# Altium PCB PCB.PcbDoc
Units mm, origin at the board's own origin, x right, y up, seen from the top; angles counter-clockwise.
Board outline 40.01 x 30.48 mm, 2 copper layers (Top Layer, Bottom Layer); 68 components, 49 nets, 270 pads, 61 vias.
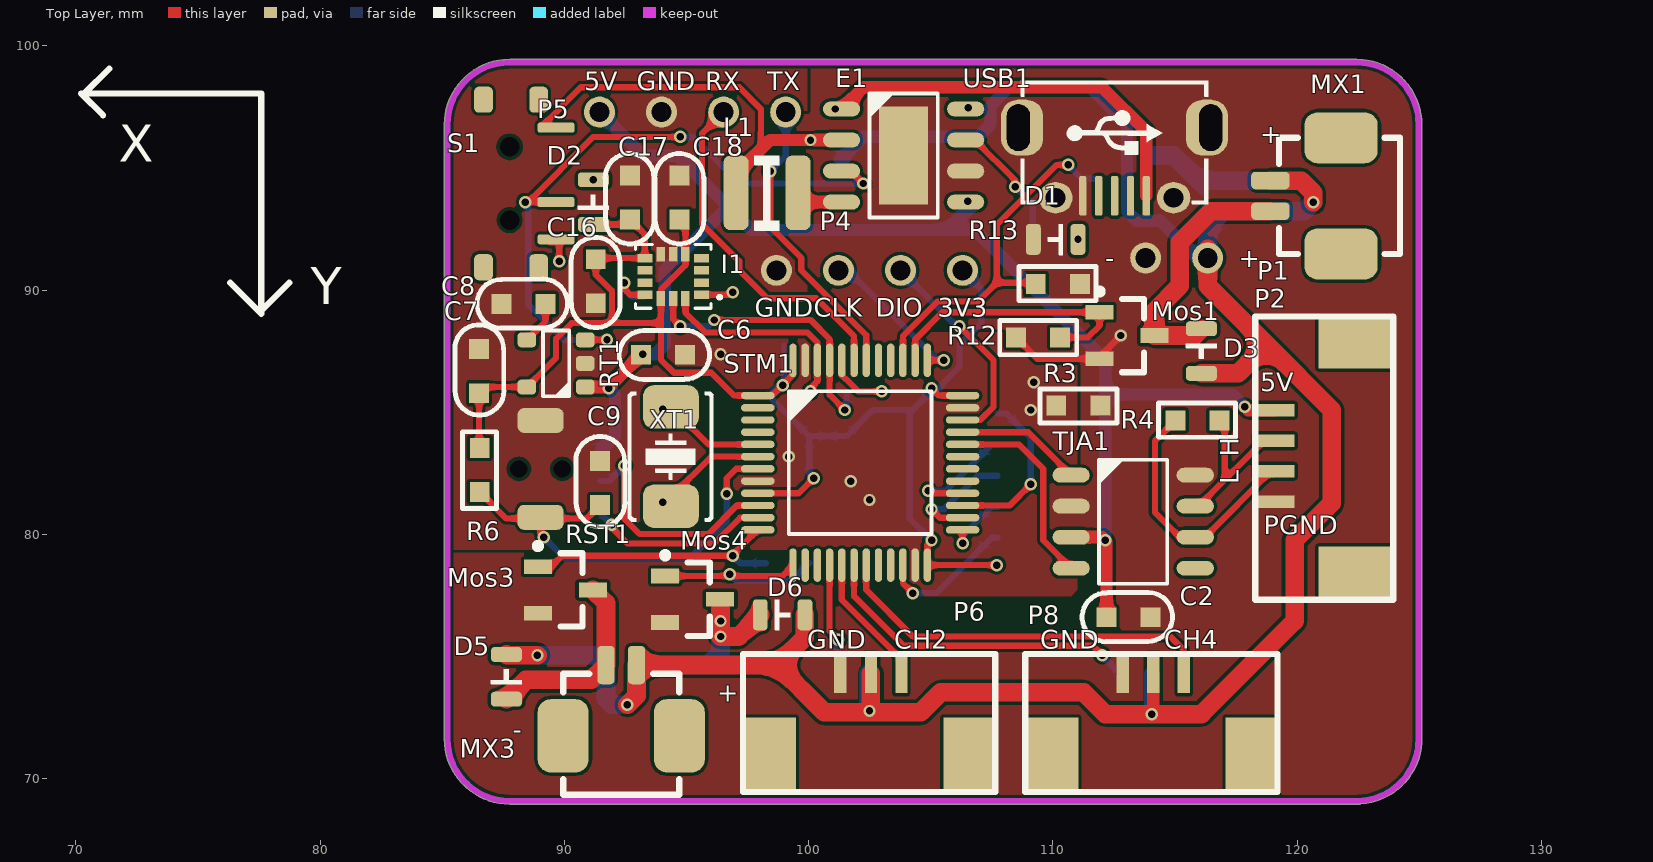
[diagram p0: Top Layer view]
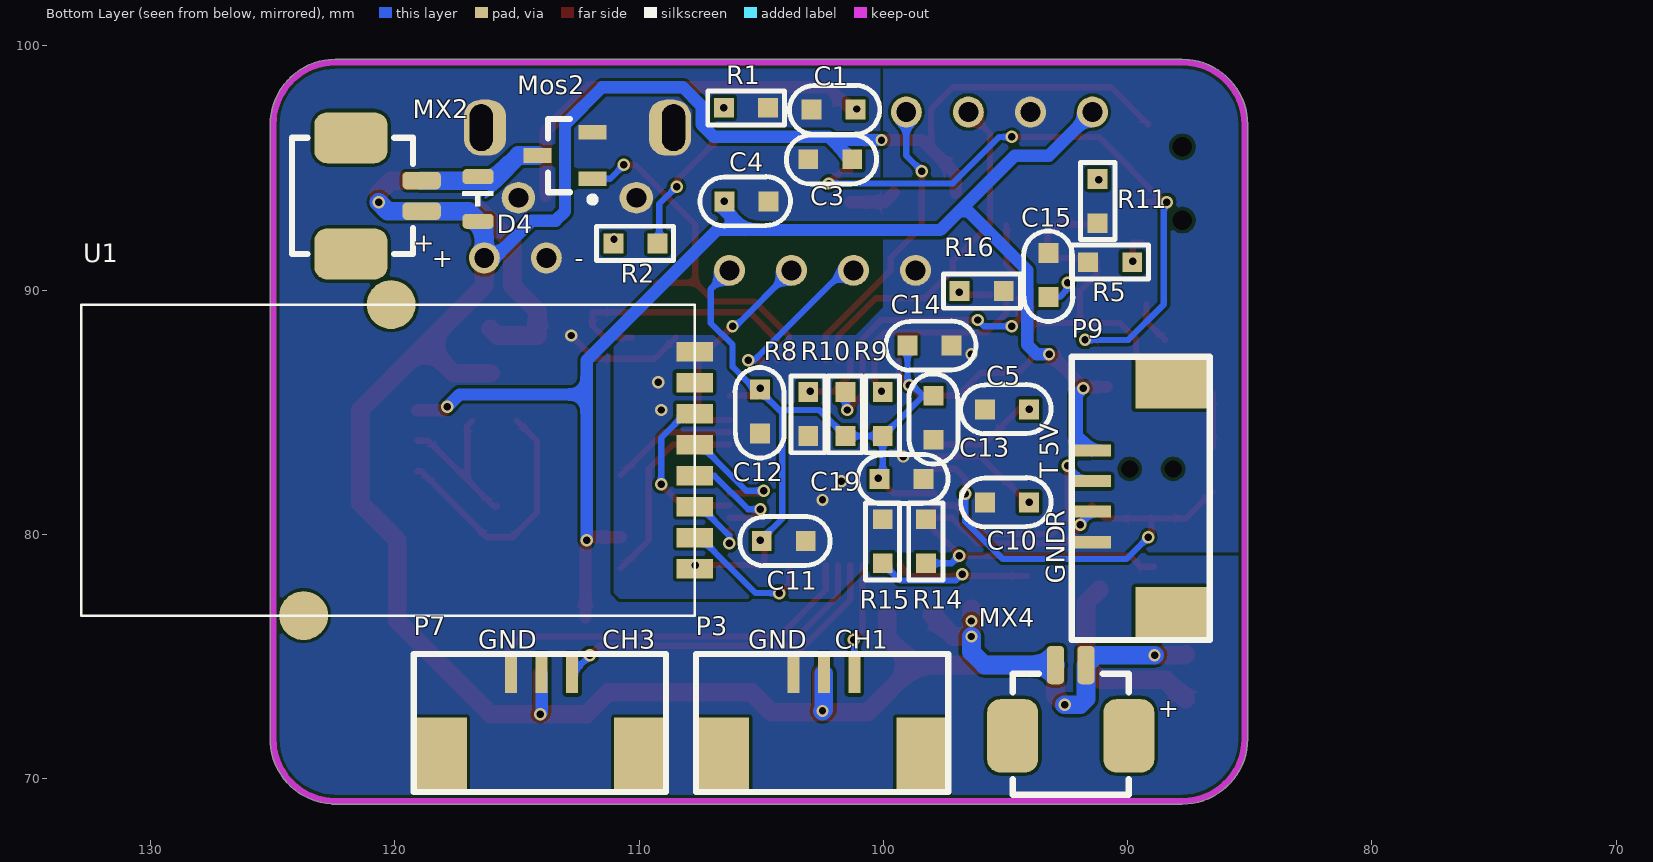
[diagram p1: Bottom Layer view, seen from below]
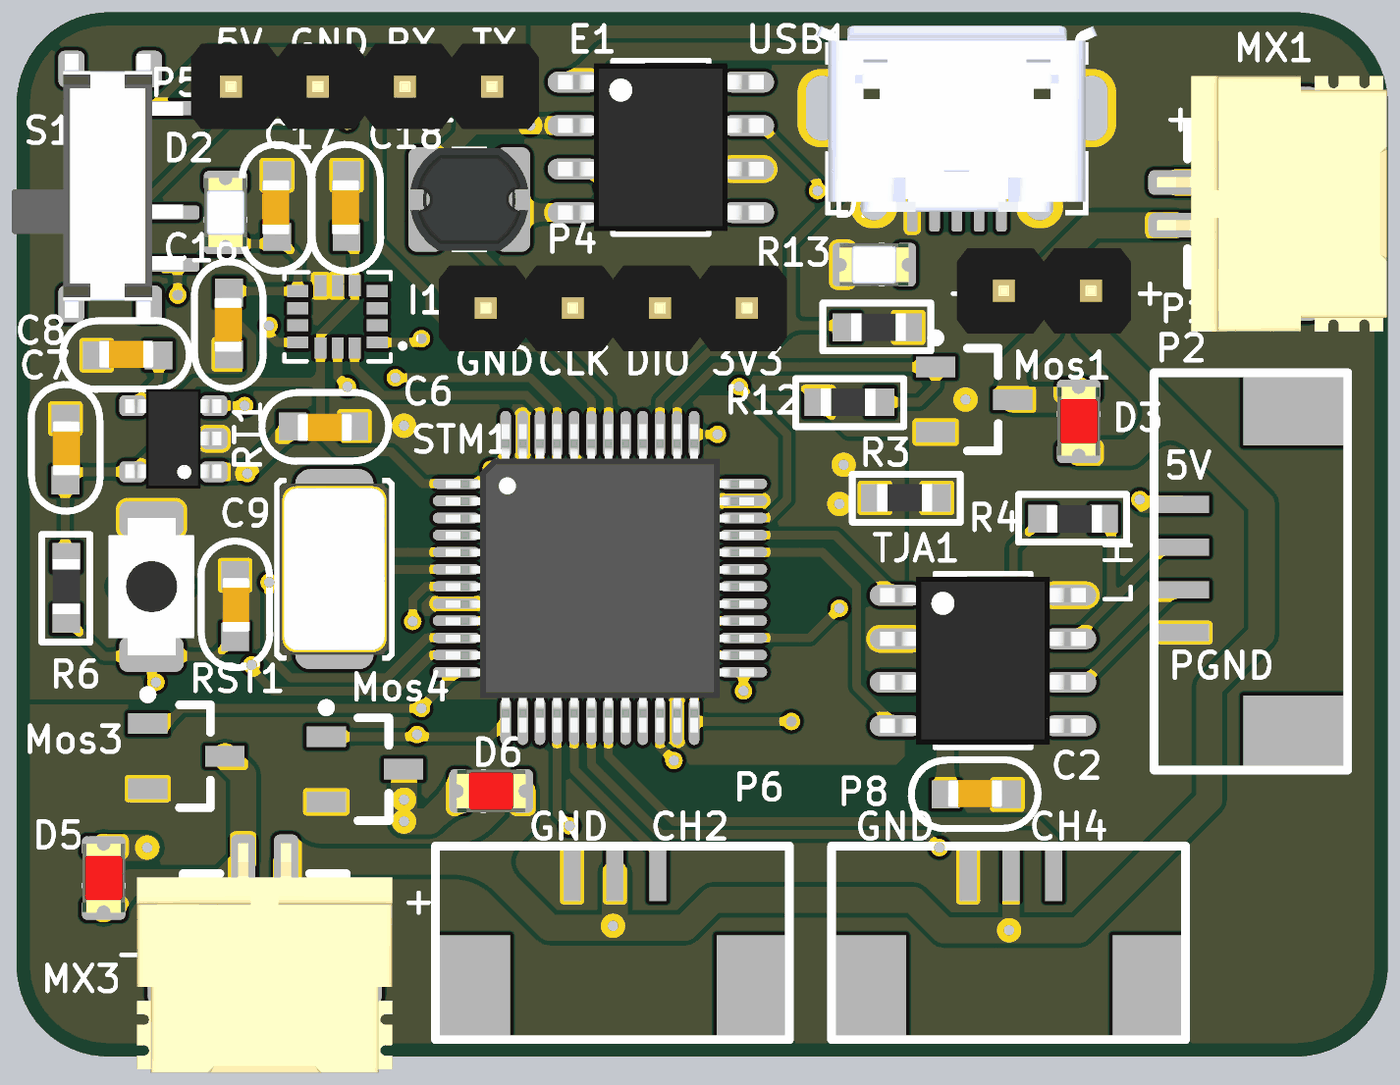
[diagram p2: 3D render of the assembled board from above, using the file's embedded part models]
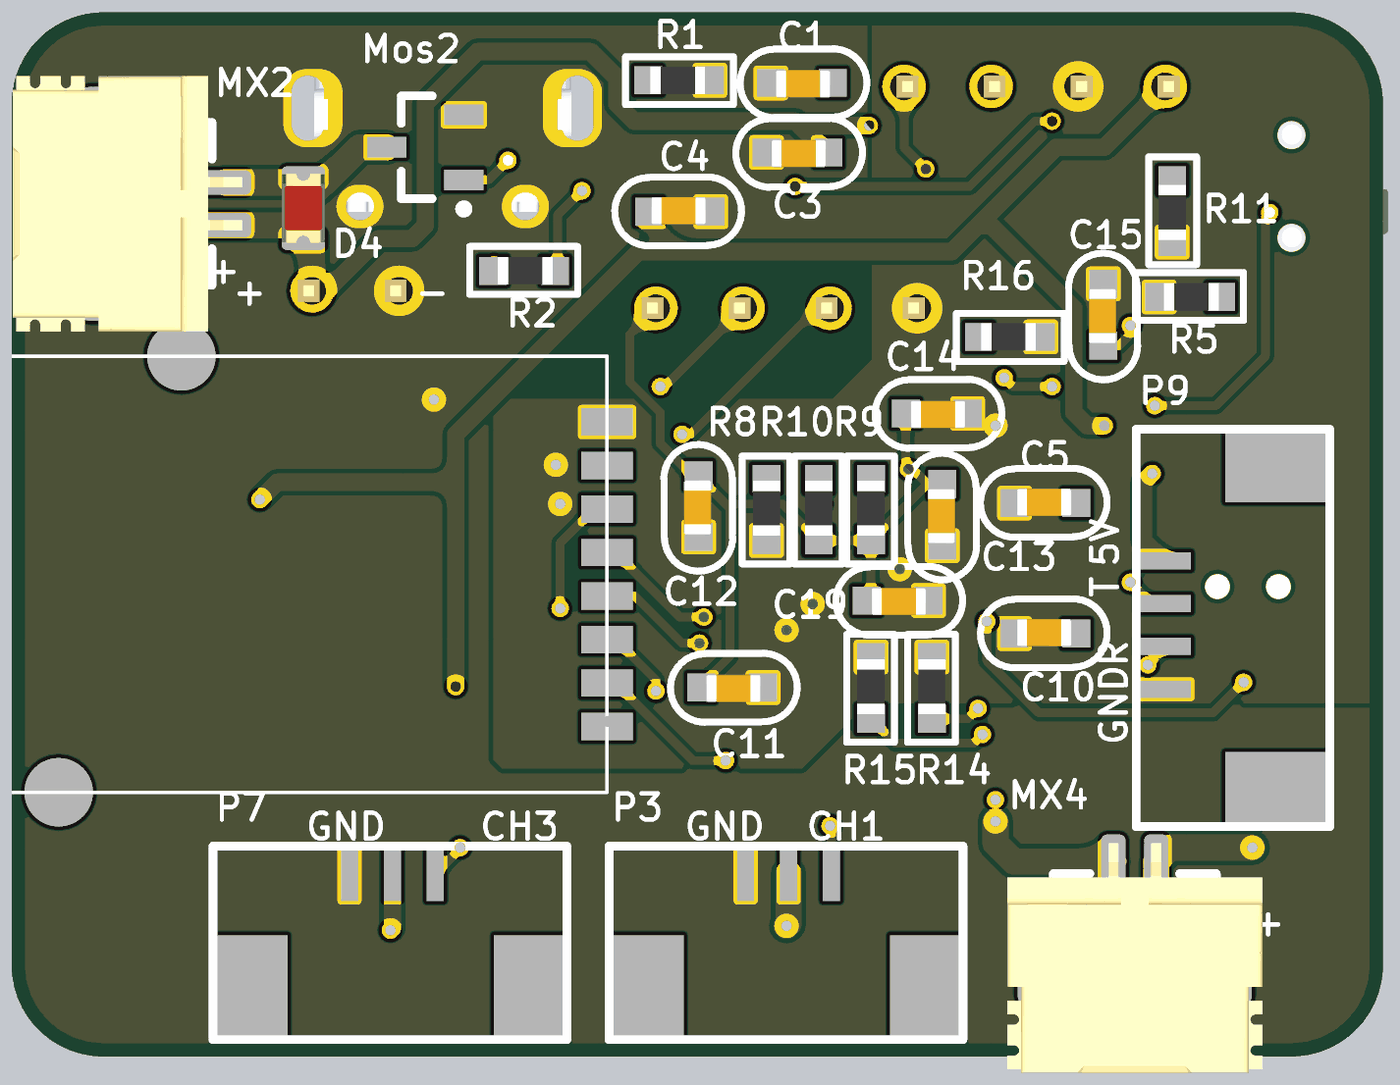
[diagram p3: 3D render of the assembled board from below, using the file's embedded part models]

## Layer stack, top to bottom
Top Solder: solder mask 0.0102, Solder Resist, Dk 3.5
Top Layer: signal copper 0.0356
Dielectric 1: dielectric 0.32, FR-4, Dk 4.8
Bottom Layer: signal copper 0.0356
Bottom Solder: solder mask 0.0102, Solder Resist, Dk 3.5

## Board outline
85.09,71.628 ccw(c87.757,71.628) 87.757,68.961 122.555,68.961 ccw(c122.555,69.088) 122.59,68.966 ccw(c122.428,71.628) 125.09,71.466 ccw(c124.968,71.501) 125.095,71.501 125.095,96.774 ccw(c122.428,96.774) 122.428,99.441 87.757,99.441 ccw(c87.757,96.774) 85.09,96.774

## Design rules (kind name [scope] priority, off if disabled: settings)
Clearance [All] p1: gap=0.127 ignorepadtopadclearanceinfootprint=FALSE
ComponentClearance [All] p1: gap=0.254 collisioncheckmode=3 verticalgap=0 showdistances=TRUE
PlaneConnect [All] p1: planeconnectstyle=Direct reliefexpansion=0.508 reliefentries=4 reliefconductorwidth=0.254 reliefairgap=0.254
PolygonConnect [All] p1: connectstyle=Direct reliefconductorwidth=0.254 reliefentries=4 polygonreliefangle="90 Angle" airgapwidth=0.254
RoutingVias [All] p1: holewidth=0.711 width=1.27 viastyle="Through Hole" minholewidth=0.711 minwidth=1.27 maxholewidth=0.711 maxwidth=1.27
SolderMaskExpansion [All] p1: expansion=0.102
Width [All] p1: maxlimit=2.54 minlimit=0.254 preferedwidth=0.254 minimp=50.000000 maximp=50.000000 favimp=50.000000
28 further rules are at their usual default settings.

## Components (designator, comment, footprint, x,y, rotation, side; value= is the part's Value field where it differs from the comment)
C1 "Cap_0603" CAP_0603 101.981,97.409 r0 bottom value=0.1uF
C2 "Cap_0603" CAP_0603 113.03,76.581 r0 top value=0.1u
C3 "Cap_0603" CAP_0603 102.108,95.377 r0 bottom value=0.1uF
C4 "Cap_0603" CAP_0603 105.664,93.599 r180 bottom value=10uF
C5 "Cap_0603" CAP_0603 94.996,85.09 r180 bottom value=20pf
C6 "Cap_0603" CAP_0603 94.107,87.376 r180 top value=1u
C7 "Cap_0603" CAP_0603 86.487,86.741 r270 top value=0.1u
C8 "Cap_0603" CAP_0603 88.265,89.408 r0 top value=22n
C9 "Cap_0603" CAP_0603 91.44,82.169 r270 top value=0.1u
C10 "Cap_0603" CAP_0603 94.996,81.28 r180 bottom value=20pf
C11 "Cap_0603" CAP_0603 104.013,79.756 r0 bottom value=0.1u
C12 "Cap_0603" CAP_0603 105.029,84.963 r90 bottom value=0.1u
C13 "Cap_0603" CAP_0603 97.917,84.709 r90 bottom value=0.1u
C14 "Cap_0603" CAP_0603 98.044,87.757 r0 bottom value=0.1u
C15 "Cap_0603" CAP_0603 93.218,90.551 r90 bottom value=0.1uF
C16 "Cap_0603" CAP_0603 91.313,90.297 r90 top value=0.1uF
C17 "Cap_0603" CAP_0603 92.71,93.726 r90 top value=0.1uF
C18 "Cap_0603" CAP_0603 94.742,93.726 r90 top value=0.1uF
C19 "Cap_0603" CAP_0603 99.187,82.296 r0 bottom value=0.1u
D1 "D_0805" LED_0805_YELLOW 110.109,92.075 r180 top
D2 "D_0805" LED_0805_YELLOW 91.186,93.599 r90 top
D3 "Diode" LED_0805_RED 116.078,87.503 r270 top
D4 "Diode" LED_0805_RED 116.586,93.726 r270 bottom
D5 "Diode" LED_0805_RED 87.63,74.168 r90 top
D6 "Diode" LED_0805_RED 98.933,76.708 r0 top
E1 "ETA9640" "SOP_E150_8 -with_PADs" 103.886,95.504 r0 top
I1 "ICM20600" ICM20600 94.488,90.551 r180 top
L1 "Ind_CD32" IND_CD32 98.298,93.98 r0 top value=4.7uH
Mos1 "MOSFET N" Nmos_SOT23 113.03,88.138 r0 top
Mos2 "MOSFET N" Nmos_SOT23 113.03,95.504 r0 bottom
Mos3 "MOSFET N" Nmos_SOT23 90.043,77.724 r0 top
Mos4 "MOSFET N" Nmos_SOT23 95.25,77.343 r0 top
MX1 "MX1.25_2P" MX1.25_S90_2P 121.793,93.853 r90 top
MX2 "MX1.25_2P" MX1.25_S90_2P 121.793,93.853 r270 bottom
MX3 "MX1.25_2P" MX1.25_S90_2P 92.329,71.755 r0 top
MX4 "MX1.25_2P" MX1.25_S90_2P 92.329,71.755 r180 bottom
P1 "HDR1x2_2.54" HDR1X2_2.54_180 116.332,91.313 r270 top
P2 "HDR1x4_2.54" 1.25X4_SMT 120.777,82.296 r270 top
P3 "HDR1x3_2.54" 1.25X3_SMT 104.267,71.374 r0 bottom
P4 "HDR1x4_2.54" HDR1x4_2.54_180 106.299,90.805 r270 top
P5 "HDR1x4_2.54" HDR1x4_2.54_180 91.44,97.282 r90 top
P6 "HDR1x3_2.54" 1.25X3_SMT 100.711,71.374 r180 top
P7 "HDR1x3_2.54" 1.25X3_SMT 115.824,71.374 r0 bottom
P8 "HDR1x3_2.54" 1.25X3_SMT 112.268,71.374 r180 top
P9 "HDR1x4_2.54" 1.25X4_SMT 89.789,80.645 r270 bottom
R1 "Res_0603" RES_0603 105.664,95.377 r0 bottom value=1.2K
R2 "Res_0603" RES_0603 110.109,93.98 r180 bottom value=10K
R3 "Res_0603" RES_0603 110.998,83.185 r180 top value=0R
R4 "Res_0603" RES_0603 115.951,86.741 r0 top value=120R
R5 "Res_0603" RES_0603 90.678,93.218 r180 bottom value=10K
R6 "Res_0603" RES_0603 84.455,82.677 r90 top value=10K
R8 "Res_0603" RES_0603 105.156,84.963 r90 bottom value=10K
R9 "Res_0603" RES_0603 102.108,84.963 r90 bottom value=10K
R10 "Res_0603" RES_0603 103.632,84.963 r90 bottom value=10K
R11 "Res_0603" RES_0603 89.154,93.599 r270 bottom value=10K
R12 "Res_0603" RES_0603 109.347,85.979 r180 top value=10K
R13 "Res_0603" RES_0603 110.236,92.329 r0 top value=10K
R14 "Res_0603" RES_0603 100.33,79.756 r90 bottom value=10K
R15 "Res_0603" RES_0603 102.108,79.756 r90 bottom value=10K
R16 "Res_0603" RES_0603 96.012,87.884 r0 bottom value=10K
RST1 "ButtonTACT_3x4x2_180" ButtonTACT_3x4x2_180H 89.027,82.677 r90 top
RT1 "RT9193" SOT23-5 89.662,86.995 r180 top
S1 "SwitchSPDT_2.8x6.6_90" SwitchSPDT_2.8X6.6_90 87.757,94.361 r270 top
STM1 "STM32F072C" LQFP_P0.5_48 102.108,82.931 r0 top
TJA1 "TJA1050" SOP_E150_8 113.284,80.518 r0 top
U1 "NRF24l01_E01_SPI3" E01-ML01SP2 107.95,89.281 r0 bottom
USB1 "USB_Micro" USB_Micro-AB 112.522,96.393 r0 top
XT1 "XTAL_5032_2P" XT_5032_2 94.361,83.185 r90 top value=8M

## Footprints (in the part's own frame and the unit in brackets; to place one, negate y for a bottom-side part, rotate by r counter-clockwise, add the part's x,y. Pads: shape width x height; smd on the part's side, far side on the other; paste and mask are expansions set on the pad)
1.25X3_SMT [mm]
  rect 2.1x3 smd: 0(-5.85,0.375) 0(2.275,0.375)
  rect 0.5x1.6 smd: 1(-3.085,-2.923) 2(-1.835,-2.923) 3(-0.585,-2.923)
  silkscreen extent -6.93,-3.73 3.4,1.93
1.25X4_SMT [mm]
  rect 2.1x3 smd: 0(-5.55,1.6) 0(3.85,1.6)
  rect 0.5x1.6 smd: 1(-2.785,-1.698) 2(-1.535,-1.698) 3(-0.285,-1.698) 4(0.965,-1.698)
  silkscreen extent -6.62,-2.5 4.97,3.15
ButtonTACT_3x4x2_180H [mil]
  round 0 hole 28: 0(0,35) 0(0,-35)
  rrect50% 40x74 smd: 1(-78,0) 2(78,0)
  body extent -79,-49 79,49, height 63
CAP_0603 [mil]
  rect 32x32 smd: 1(-33,1) 2(38,1)
  silkscreen extent -72,-38 73,41, body extent -30,-14 33,18, height 31
E01-ML01SP2 [mm]
  rect 1.5x0.8 smd: 1(-0.225,10.689) 2(-0.225,9.419) 3(-0.225,8.149) 4(-0.225,6.879) 5(-0.225,5.609) 6(-0.225,4.339) 7(-0.225,3.069) 8(-0.225,1.799)
  round 2 smd: 10(12.195,-0.121) 11(15.775,12.609)
  silkscreen extent -0.22,-0.12 24.87,12.61
HDR1X2_2.54_180 [mil]
  round 50 hole 32: 1(0,0) 2(0,-100)
  body extent -49,-150 49,50, height 323
HDR1x4_2.54_180 [mil]
  round 50 hole 32: 1(0,0) 2(0,-100) 3(0,-200) 4(0,-300)
  body extent -49,-350 49,50, height 323
ICM20600 [mm]
  rect 0.61x0.35 smd: 1(-1.127,0.746) 2(-1.127,0.246) 3(-1.127,-0.254) 4(-1.127,-0.754) 8(1.193,-0.754) 9(1.193,-0.254) 10(1.193,0.246) 11(1.193,0.746)
  rect 0.35x0.61 smd: 5(-0.467,-0.914) 6(0.033,-0.914) 7(0.533,-0.914) 12(0.533,0.906) 13(0.033,0.906) 14(-0.467,0.906)
  silkscreen extent -1.94,-1.3 1.58,1.3
IND_CD32 [mil]
  rrect50% 40x120 smd: 1(-50,0) 2(50,0)
  silkscreen extent -20,-60 20,60, body extent -68,-59 68,59, height 83
LED_0805_RED [mil]
  rrect50% 24x50 smd: 1(-36,0) 2(36,0)
  silkscreen extent -12,-25 12,24, body extent -40,-25 40,25, height 43
LED_0805_YELLOW [mil]
  rrect50% 24x50 smd: 1(-36,0) 2(36,0)
  silkscreen extent -12,-24 12,24, body extent -40,-25 40,25, height 43
LQFP_P0.5_48 [mil]
  oval 54x12 smd: 1(-165,108.27) 2(-165,88.58) 3(-165,68.9) 4(-165,49.21) 5(-165,29.53) 6(-165,9.84) 7(-165,-9.84) 8(-165,-29.53) 9(-165,-49.21) 10(-165,-68.9) 11(-165,-88.58) 12(-165,-108.27) 25(165,-108.27) 26(165,-88.58) 27(165,-68.9) 28(165,-49.21) 29(165,-29.53) 30(165,-9.84) 31(165,9.84) 32(165,29.53) 33(165,49.21) 34(165,68.9) 35(165,88.58) 36(165,108.27)
  oval 12x54 smd: 13(-108.27,-165) 14(-88.58,-165) 15(-68.9,-165) 16(-49.21,-165) 17(-29.53,-165) 18(-9.84,-165) 19(9.84,-165) 20(29.53,-165) 21(49.21,-165) 22(68.9,-165) 23(88.58,-165) 24(108.27,-165) 37(108.27,165) 38(88.58,165) 39(68.9,165) 40(49.21,165) 41(29.53,165) 42(9.84,165) 43(-9.84,165) 44(-29.53,165) 45(-49.21,165) 46(-68.9,165) 47(-88.58,165) 48(-108.27,165)
  silkscreen extent -115,-115 115,115, body extent -177,-178 177,177, height 61
MX1.25_S90_2P [mil]
  rrect50% 82x118 smd: 0(-93.58,0) 0(93.58,0)
  rrect50% 28x62 smd: 1(-24.61,114) 2(24.61,114)
  silkscreen extent -94,-95 94,100, body extent -147,-129 147,135, height 130
Nmos_SOT23 [mm]
  rect 1.15x0.6 smd: D(1.125,0) G(-1.125,0.95) S(-1.125,-0.95)
  silkscreen extent -1.25,-1.5 0.7,1.92, body extent -0.7,-1.5 0.7,1.5, height 1.14
RES_0603 [mil]
  rect 32x32 smd: 1(-37,-82) 2(34,-82)
  silkscreen extent -64,-109 60,-54, body extent -31,-98 31,-66, height 18
SOP_E150_8 [mil]
  oval 60x24 smd: 1(-100,75) 2(-100,25) 3(-100,-25) 4(-100,-75) 5(100,-75) 6(100,-25) 7(100,25) 8(100,75)
  silkscreen extent -55,-100 55,100, body extent -118,-96 118,96, height 69
"SOP_E150_8 -with_PADs" [mil]
  oval 60x24 smd: 1(-100,75) 2(-100,25) 3(-100,-25) 4(-100,-75) 5(100,-75) 6(100,-25) 7(100,25) 8(100,75)
  rect 78.74x157.48 smd: 9(0,0)
  silkscreen extent -55,-100 55,100, body extent -118,-96 118,96, height 69
SOT23-5 [mil]
  rrect50% 30x24 smd: 1(-47,38) 2(-47,0) 3(-47,-38) 4(47,-38) 5(47,38)
  silkscreen extent -21,-53 21,53, body extent -55,-57 55,57, height 57
SwitchSPDT_2.8X6.6_90 [mil]
  rrect50% 42x30 smd: 0(-135,-42) 0(-135,47) 0(135,-42) 0(135,47)
  round 10 hole 31.5: 0(-59.06,0) 0(59.06,0)
  rrect50% 16x60 smd: 1(90,75) 2(30,75) 3(-90,75)
  body extent -152,-111 151,86, height 55
USB_Micro-AB [mil]
  rrect80% 68x90 hole 37 slot 75 at 90 deg copper offset 6,0 mask+0: 0(-155,10)
  oval 54x50 hole 32 mask+0: 0(-95,-103) 0(95,-103)
  rrect80% 68x90 hole 37 slot 75 at 90 deg copper offset -6,0 mask+0: 0(155,10)
  rrect50% 12x64 smd: 1(51.18,-100) 2(25.59,-100) 3(0,-100) 4(-25.59,-100) 5(-51.18,-100)
  silkscreen extent -150,-112 150,86, body extent -161,-109 161,104, height 108
XT_5032_2 [mil]
  rrect50% 70x90 smd: 1(-80,0) 2(80,0)
  silkscreen extent -104,-68 104,68, body extent -98,-63 98,63, height 39

## Part data
C1 C2 C3 C4 C5 C6 C7 C8 C9 C10 C11 C12 C13 C14 C15 C16 C17 C18 C19: "Capacitor"
L1: "Inductor"
Mos1 Mos2 Mos3 Mos4: "MOS SOT23"
MX1 MX2 MX3 MX4: "MX"
P1 P2 P3 P4 P5 P6 P7 P8 P9: "Header"
R1 R2 R3 R4 R5 R6 R8 R9 R10 R11 R12 R13 R14 R15 R16: "Resistor"
RST1: "Button"
RT1: "Power"
S1: "Switch"
STM1: library part STM32F103C, "MCU"
U1: library part NRF24l01_E01_SPI2
USB1: "USB"
XT1: "Crystal Oscillator"

## Via types
v1: diameter 0.508, hole 0.305, Top Layer to Bottom Layer, 61 vias

## Nets (pads, with @x,y where several pads share a name; then routed paths per layer and width w, separated by ;. In a path a pad name is that pad's centre, name@x,y a point inside that pad or via, vN(x,y) a via of type N, cw(c..) or ccw(c..) an arc to the next point about the centre after c; other vN are vias at no path point)
3V3: C7.2 C11.2 C12.2 C13.2 C14.2 C16.2 C17.1 C18.1 C19.2 D2.1 I1.5 I1.8 I1.12 P4.1 R6.2 R9.1 R10.1 RT1.5 STM1.1 STM1.9 STM1.24 STM1.36 STM1.48 U1.1 | length 64.9
  Top Layer w0.254: R6.2@86.512,83.566 C7.2 86.766,86.03 RT1.5 89.662,87.224 89.662,88.011 90.297,88.646 91.948,88.646 ; D2.1@90.932,92.685 92.481,92.685 C17.1 93.295,92.278 I1.8 91.331,91.305 C16.2 91.288,90.631 91.948,89.97 91.948,88.646 ; C18.1@94.955,92.65 I1.5 94.955,91.018 93.955,90.018 I1.12 93.955,88.646 ; STM1.9 99.588,81.681 v1(100.203,82.296) ; STM1.48 99.358,86.531 v1(98.933,86.106) 98.508,85.681 STM1.1 96.945,85.681 96.012,86.614 94.488,86.614 93.955,87.147 93.955,88.646 ; v1(105.029,79.756) 104.858,79.585 STM1.24 v1(107.696,78.74) ; v1(105.029,85.979) 105.327,85.681 STM1.36 ; 91.948,88.646 93.955,88.646
  Bottom Layer w0.254: C14.2 99.009,86.309 98.374,85.674 R9.1 ; v1(100.203,82.296) 100.025,82.474 R9.1 ; v1(105.029,79.756) 104.14,80.645 104.14,84.963 104.267,85.09 ; P4.1 107.061,90.043 107.061,88.646 106.172,87.757 106.172,86.853 105.298,85.979 v1(105.029,85.979) 105.029,85.852 104.267,85.09 ; R9.1 R10.1 102.616,85.09 104.267,85.09
5V: C2.1 C4.1 C6.2 E1.5 P2.1 P5.1 P9.1 RT1.1 TJA1.3 | length 59.2
  Top Layer w0.508: RT1.1 91.821,86.03 C6.2 ; TJA1.3 112.014,79.883 v1(112.141,79.756) 112.192,79.705 C2.1 ; v1(117.856,85.217) 117.992,85.081 P2.1
  Bottom Layer w0.508: P5.1 93.218,95.504 94.615,95.504 96.901,93.218 ; P9.1 92.075,84.018 92.075,85.725 v1(91.821,85.979) ; v1(93.218,87.376) 93.726,87.376 94.107,87.757 94.107,90.805 96.52,93.218 96.901,93.218 ; v1(106.502,93.624) 106.502,93.294 105.664,92.456 ; v1(112.141,79.756) 112.141,85.725 ; v1(117.856,85.217) 117.348,85.725 112.141,85.725 ; 96.901,93.218 97.663,92.456 105.664,92.456 ; 105.664,92.456 106.807,92.456 112.141,87.122 112.141,85.725
CAN_H: P2.2 R4.2 TJA1.7 | length 6.9
  Top Layer w0.254: TJA1.7 115.951,81.153 117.03,82.233 ; R4.2 117.03,84.442 117.03,82.233 ; P2.2 118.629,83.831 117.03,82.233
CAN_L: P2.3 R4.1 TJA1.6 | length 10.6
  Top Layer w0.254: R4.1 114.173,83.82 114.173,80.899 115.189,79.883 TJA1.6 116.222,79.883 118.92,82.581 P2.3
CAN_RX: STM1.32 TJA1.4 | length 8.3
  Top Layer w0.254: STM1.32 108.597,83.681 109.601,82.677 109.601,79.756 TJA1.4
CAN_TX: STM1.33 TJA1.1 | length 5.2
  Top Layer w0.254: STM1.33 108.986,84.181 TJA1.1
CE: STM1.22 U1.2 | length 5.7
  Top Layer w0.254: STM1.22 103.858,78.006 v1(104.267,77.597)
  Bottom Layer w0.254: v1(104.267,77.597) 105.221,77.597 107.486,79.862 U1.2
CSN: STM1.25 U1.3 | length 2.8
  Top Layer w0.254: v1(106.299,79.629) STM1.25
  Bottom Layer w0.254: v1(106.299,79.629) 106.299,79.945 107.486,81.132 U1.3
GND: C5.1 C6.1 C7.1 C8.1 C9.1 C10.1 C11.1 C12.1 C13.1 C14.1 C15.2 C16.1 C17.2 C18.2 C19.1 I1.6 I1.7 P4.4 P5.2 P9.4 R3.2 R5.1 R8.1 R11.2 R14.2 R15.2 R16.1 RST1.2 RT1.2 STM1.8 STM1.23 STM1.35 STM1.47 U1.8
  other v1: 102.489,81.407 101.727,82.169 99.187,83.185 109.093,85.09 109.22,86.233 96.393,87.376
MISO: STM1.27 U1.6 | length 6.8
  Top Layer w0.254: STM1.27 108.232,81.181 v1(109.093,82.042)
  Bottom Layer w0.254: U1.6 108.098,84.942 109.093,83.947 v1(109.093,82.042)
MOSI: STM1.28 U1.5 | length 5
  Top Layer w0.254: v1(104.902,81.788) 105.009,81.681 STM1.28
  Bottom Layer w0.254: v1(104.902,81.788) 105.602,81.788 107.486,83.672 U1.5
NetC5_2: C5.2 STM1.5 XT1.2 | length 4.2
  Top Layer w0.254: XT1.2 95.897,83.681 STM1.5
  other v1: 94.031,85.115
NetC8_2: C8.2 RT1.4 | length 1.8
  Top Layer w0.254: RT1.4 89.23,88.722 C8.2
NetC10_2: C10.2 STM1.6 XT1.1 | length 4.6
  Top Layer w0.254: XT1.1 94.361,81.534 96.008,83.181 STM1.6
  other v1: 94.031,81.305
NetC15_1: C15.1 I1.11 | length 2.4
  Top Layer w0.254: v1(92.456,90.297) 92.456,90.043 92.694,89.805 I1.11
  Bottom Layer w0.254: v1(92.456,90.297) 92.456,90.043 92.786,89.713 C15.1
NetD1_1: D1.1 R2.1
  other v1: 111.023,92.075
NetD2_2: D2.2 R11.1
  other v1: 91.186,94.513
NetD3_1: D3.1 Mos1.D MX1.1 | length 10.5
  Top Layer w0.762: D3.1 115.799,88.138 Mos1.D 114.155,89.136 115.189,90.17 115.189,91.948 116.469,93.228 MX1.1
NetD4_1: D4.1 Mos2.D MX2.1 | length 5.2
  Bottom Layer w0.762: Mos2.D 114.935,95.504 115.961,94.478 MX2.1
NetD5_1: D5.1 Mos3.D MX3.1 | length 7.9
  Top Layer w0.762: D5.1 88.417,74.041 91.094,74.041 MX3.1 91.704,77.188 Mos3.D
NetD6_1: D6.1 Mos4.D MX4.1 | length 7.4
  Top Layer w0.762: 96.393,76.962 v1(96.393,76.454) v1(96.393,75.819) 97.13,75.819 D6.1
  Bottom Layer w0.762: MX4.1 95.86,74.651 96.393,75.184 v1(96.393,75.819)
NetE1_4: E1.4 L1.2 | length 1.9
  Top Layer w0.508: L1.2 99.949,93.599 E1.4
NetE1_7: E1.7 R2.2 | length 5.6
  Top Layer w0.254: E1.7 106.807,96.139 108.458,94.488 v1(108.458,94.234)
  Bottom Layer w0.254: v1(108.458,94.234) 109.169,93.523 R2.2@109.169,91.897
NetE1_8: E1.8 R1.2
  other v1: 106.528,97.46
NetI1_1: I1.1 R16.2 | length 1.3
  Top Layer w0.254: I1.1 96.79,89.805 v1(96.901,89.916)
NetR5_2: R5.2 S1.1 | length 1.1
  Top Layer w0.254: S1.1@89.408,91.948 89.789,91.948 v1(89.789,91.186)
NetR8_2: R8.2 STM1.44 | length 2.5
  Top Layer w0.254: STM1.44 101.358,86.506 101.504,86.36 101.512,86.36 102.02,85.852 v1(102.997,85.852)
PGND: C1.2 C2.2 C3.2 C4.2 D1.2 E1.6 E1.9 Mos1.S Mos2.S Mos3.S Mos4.S P1.2 P2.4 P3.3 P6.3 P7.3 P8.3 R1.1 R3.1 R12.2 R13.2 TJA1.2 TJA1.8 USB1.0 USB1.5 | length 5
  Top Layer w0.254: R12.2 109.357,87.188 111.826,87.188 v1(112.776,88.138)
RST: C9.2 R6.1 RST1.1 STM1.7 | length 18.2
  Top Layer w0.254: R6.1 87.63,80.645 RST1.1@89.027,80.645 ; RST1.1 RST1.1@89.027,80.645 ; v1(89.154,79.883) 89.027,80.01 RST1.1@89.027,80.645 ; C9.2 90.907,80.645 RST1.1@89.027,80.645 ; v1(96.647,81.661) 96.647,82.296 97.032,82.681 STM1.7
  Bottom Layer w0.254: v1(89.154,79.883) 90.043,78.994 95.123,78.994 96.647,80.518 v1(96.647,81.661)
SCK: STM1.26 U1.4 | length 4.7
  Top Layer w0.254: v1(105.029,81.026) 105.374,80.681 STM1.26
  Bottom Layer w0.254: v1(105.029,81.026) 105.537,81.026 106.913,82.402 U1.4
SCL: I1.13 R10.2 STM1.45 | length 11.7
  Top Layer w0.254: I1.13 94.455,88.806 v1(94.742,88.519) ; v1(96.139,88.773) 100.076,88.773 100.858,87.991 STM1.45 100.858,85.705 v1(101.473,85.09)
  Bottom Layer w0.254: v1(94.742,88.519) 95.885,88.519 v1(96.139,88.773) ; v1(101.473,85.09) 101.549,85.166 R10.2
SDA: I1.14 R9.2 STM1.46 | length 8.6
  Top Layer w0.254: I1.14 94.955,89.068 95.758,88.265 99.949,88.265 100.358,87.856 STM1.46 100.358,86.261 100.076,85.979 v1(100.076,85.852)
SWCLK: P4.3 STM1.37 | length 6.5
  Top Layer w0.254: STM1.37 v1(105.537,87.122)
  Bottom Layer w0.254: P4.3 101.6,90.805 105.283,87.122 v1(105.537,87.122)
SWDIO: P4.2 STM1.34 | length 8.7
  Top Layer w0.254: v1(106.172,88.519) 107.569,87.122 107.569,85.217 107.033,84.681 STM1.34
  Bottom Layer w0.254: P4.2 106.045,88.519 v1(106.172,88.519)
TIM2_CH1: Mos1.G R12.1 STM1.38 | length 11.2
  Top Layer w0.254: STM1.38 104.358,87.975 105.471,89.088 Mos1.G 111.905,88.537 111.43,88.062 R12.1
TIM2_CH2: Mos2.G R13.1 STM1.39 | length 15.2
  Top Layer w0.254: STM1.39 103.858,88.11 105.283,89.535 106.934,89.535 107.696,90.297 ; R13.1 109.245,90.297 107.696,90.297 ; v1(110.617,95.123) 110.147,95.123 107.696,92.672 107.696,90.297
  Bottom Layer w0.254: v1(110.617,95.123) 111.186,94.554 Mos2.G
TIM2_CH3: Mos3.G R14.1 STM1.12 | length 11.1
  Top Layer w0.254: Mos3.G 89.469,78.674 89.916,79.121 96.857,79.121 STM1.12
  Bottom Layer w0.254: v1(96.901,79.121) 97.206,78.816 R14.1
TIM2_CH4: Mos4.G R15.1 STM1.13 | length 9.1
  Top Layer w0.254: Mos4.G 98.911,78.293 STM1.13
  Bottom Layer w0.254: v1(96.774,78.359) 97.028,78.105 99.314,78.105 R15.1
TIM3_CH1: P3.1 STM1.16 | length 4.6
  Top Layer w0.254: STM1.16 100.858,76.053 v1(101.219,75.692)
  Bottom Layer w0.254: P3.1 v1@101.182,75.655
TIM3_CH2: P6.1 STM1.17 | length 5.5
  Top Layer w0.254: STM1.17 101.358,77.331 103.796,74.893 P6.1
TIM3_CH3: P7.1 STM1.18 | length 13.5
  Top Layer w0.254: STM1.18 101.858,77.466 103.886,75.438 111.633,75.438 v1(112.014,75.057)
  Bottom Layer w0.254: v1(112.014,75.057) 112.014,75.022 P7.1
TIM3_CH4: P8.1 STM1.19 | length 16
  Top Layer w0.254: STM1.19 102.358,77.728 104.267,75.819 114.808,75.819 115.353,75.274 P8.1
U1_RX: P5.3 STM1.43 | length 14.3
  Top Layer w0.254: P5.3 95.631,96.393 95.631,92.71 97.155,91.186 97.155,90.805 98.298,89.662 100.312,89.662 101.858,88.116 STM1.43
U1_TX: P5.4 STM1.42 | length 12.1
  Top Layer w0.254: v1(98.425,94.869) 98.425,92.583 99.695,91.313 99.695,90.818 102.358,88.155 STM1.42
  Bottom Layer w0.254: v1(98.425,94.869) 99.06,95.504 P5.4
U4_RX: P9.3 STM1.11 | length 7.5
  Top Layer w0.254: v1(91.948,80.391) 91.948,80.264 92.583,79.629 96.139,79.629 97.191,80.681 STM1.11
  Bottom Layer w0.254: P9.3 91.487,80.852 v1(91.948,80.391)
U4_TX: P9.2 STM1.10 | length 9.6
  Top Layer w0.254: v1(92.456,82.804) 92.456,80.645 93.091,80.01 95.885,80.01 97.056,81.181 STM1.10
  Bottom Layer w0.254: P9.2 91.832,82.18 v1(92.456,82.804)
VIN: C3.1 D3.2 D4.2 D5.2 D6.2 E1.2 L1.1 MX1.2 MX2.2 MX3.2 MX4.2 P1.1 P3.2 P6.2 P7.2 P8.2 S1.3 | length 117.4
  Top Layer w0.254: S1.3@89.154,96.774 90.678,98.298 97.155,98.298 98.044,97.409 98.044,95.758
  Top Layer w0.508: L1.1 97.028,94.742 98.425,96.139 v1(100.076,96.139) E1.2 ; v1@114.103,72.651 P8.2
  Top Layer w0.762: D5.2 87.655,75.057 v1(88.9,75.057) ; v1(92.583,73.025) 92.954,73.396 MX3.2 98.704,74.651 ; D6.2 99.847,75.794 98.704,74.651 ; P6.2 v1@102.546,72.714 ; D3.2 117.577,86.589 118.745,87.757 ; P1.1@116.332,91.694 P1.1 116.332,90.17 118.745,87.757 ; MX1.2 120.159,94.478 120.65,93.987 v1(120.65,93.599) ; 98.704,74.651 100.641,72.714 v1@102.546,72.714 ; v1@102.546,72.714 104.591,72.714 105.41,73.533 111.252,73.533 112.141,72.644 v1(114.046,72.644) 116.078,72.644 119.888,76.454 119.888,79.756 121.412,81.28 121.412,85.09 118.745,87.757
  Bottom Layer w0.508: v1(100.076,96.139) 102.108,96.139 ; C3.1 101.321,95.352 102.108,96.139 ; P7.2 113.989,72.701 v1(114.046,72.644) ; P1.1 115.911,91.313 114.387,92.837 113.411,92.837 113.03,93.218 113.03,96.774 111.506,98.298 108.204,98.298 107.442,97.536 107.442,96.774 106.934,96.266 102.235,96.266 102.108,96.139
  Bottom Layer w0.762: v1(88.9,75.057) 91.298,75.057 MX4.2 91.704,73.269 91.948,73.025 v1(92.583,73.025) ; P3.2 102.432,72.828 v1(102.489,72.771) ; P1.1@116.332,91.694 116.332,92.583 116.977,93.228 MX2.2 120.279,93.228 v1(120.65,93.599)
VIN_SW: E1.3 RT1.3 S1.2 | length 26.6
  Top Layer w0.254: S1.2@89.281,93.599 88.519,93.599 91.186,96.266 v1(94.742,96.266) ; RT1.3 v1(91.745,87.96) ; E1.3 101.727,94.869 v1(102.235,94.361) v1@102.362,94.234
  Bottom Layer w0.254: v1(88.392,93.599) 88.519,93.472 88.519,89.408 89.967,87.96 v1(91.745,87.96) ; v1(94.742,96.266) 95.25,96.266 97.155,94.361 v1(102.235,94.361)
VUSB: C1.1 E1.1 USB1.1 | length 16.2
  Top Layer w0.508: E1.1 102.235,98.298 112.014,98.298 113.822,96.49 USB1.1
  other v1: 101.092,97.409
pads on no net: I1.2 I1.3 I1.4 I1.9 I1.10 MX1.0 MX2.0 MX3.0 MX4.0 P2.0 P3.0 P6.0 P7.0 P8.0 P9.0 RST1.0 S1.0 STM1.2 STM1.3 STM1.4 STM1.14 STM1.15 STM1.20 STM1.21 STM1.29 STM1.30 STM1.31 STM1.40 STM1.41 TJA1.5 U1.7 U1.10 U1.11 USB1.2 USB1.3 USB1.4

## Polygon pours and split planes (outlines as drawn)
GND on Top Layer "Top Layer-No Net" (solid, remove dead copper, pour order 0): 83.439,101.092 83.947,100.584 99.949,100.584 99.949,89.408 101.092,88.265 110.998,88.265 110.998,77.724 110.744,77.47 101.981,77.47 100.076,79.375 82.296,79.375
PGND on Top Layer "Top Layer-No Net" (solid, remove dead copper, pour order 4): 81.788,102.235 125.857,102.235 130.302,97.79 130.302,65.659 81.788,65.659 80.518,66.929
GND on Bottom Layer "Top Layer-No Net" (solid, remove dead copper, pour order 2): 83.484,100.986 83.992,100.478 99.994,100.478 99.994,89.302 101.137,88.159 111.043,88.159 111.043,77.618 110.789,77.364 102.026,77.364 100.121,79.269 82.341,79.269
PGND on Bottom Layer "Top Layer-No Net" (solid, remove dead copper, pour order 6): 81.28,101.854 81.788,101.346 129.54,101.346 129.54,69.215 128.524,68.199 81.534,68.199

## Keep-outs
Keep-Out Layer:
  lines w0.254: 122.428,69.088 ccw(c122.428,71.628) 124.968,71.628 ; 122.555,69.088 87.757,69.088 cw(c87.757,71.628) 85.217,71.628 85.217,96.774 cw(c87.757,96.774) 87.757,99.314 122.428,99.314 cw(c122.428,96.774) 124.968,96.774 124.968,71.501

## Silkscreen, mask and mechanical layers (free items; w line width, h text height)
Top Overlay:
  lines w0.254: 71.12,97.155 70.231,98.044 ; 71.374,99.06 70.358,98.044 70.231,98.044 ; 76.327,90.297 77.597,89.027 ; 78.74,90.297 77.597,89.154 77.597,89.027 ; 70.231,98.044 77.597,98.044 77.597,89.027
  text "5V" at 90.805,98.171 h0.76
  text "GND" at 92.964,98.171 h0.76
  text "RX" at 95.758,98.171 h0.76
  text "TX" at 98.298,98.171 h0.76
  text "+" at 118.491,96.012 h0.76
  text "X" at 71.755,95.25 h1.52
  text "-" at 112.141,90.932 h0.76
  text "+" at 117.602,90.932 h0.76
  text "Y" at 79.629,89.408 h1.52
  text "GND" at 97.79,88.9 h0.76
  text "CLK" at 100.203,88.9 h0.76
  text "DIO" at 102.743,88.9 h0.76
  text "3V3" at 105.283,88.9 h0.76
  text "5V" at 118.491,85.852 h0.76
  text "H" at 117.602,83.185 h0.76 r90
  text "L" at 117.602,82.042 h0.76 r90
  text "PGND" at 118.618,80.01 h0.76
  text "GND" at 99.949,75.311 h0.76
  text "CH2" at 103.505,75.311 h0.76
  text "GND" at 109.474,75.311 h0.76
  text "CH4" at 114.554,75.311 h0.76
  text "+" at 96.266,73.152 h0.76
  text "-" at 87.884,71.628 h0.76
Bottom Overlay:
  text "+" at 118.364,91.567 h0.76
  text "-" at 112.268,90.932 h0.76
  text "+" at 117.602,90.932 h0.76
  text "5V" at 92.837,83.185 h0.76 r270
  text "T" at 92.837,82.296 h0.76 r270
  text "R" at 92.583,80.264 h0.76 r270
  text "GND" at 92.583,77.978 h0.76 r270
  text "CH1" at 101.981,75.311 h0.76
  text "GND" at 105.537,75.311 h0.76
  text "CH3" at 111.506,75.311 h0.76
  text "GND" at 116.586,75.311 h0.76
  text "+" at 87.884,72.517 h0.76